# Altium PCB piezo-button-pcb1.PcbDoc
Units mm, origin at the board's own origin, x right, y up, seen from the top; angles counter-clockwise.
Board outline 23.9 x 15.9 mm, 2 copper layers (Top Layer, Bottom Layer); 17 components, 12 nets, 44 pads, 6 vias.
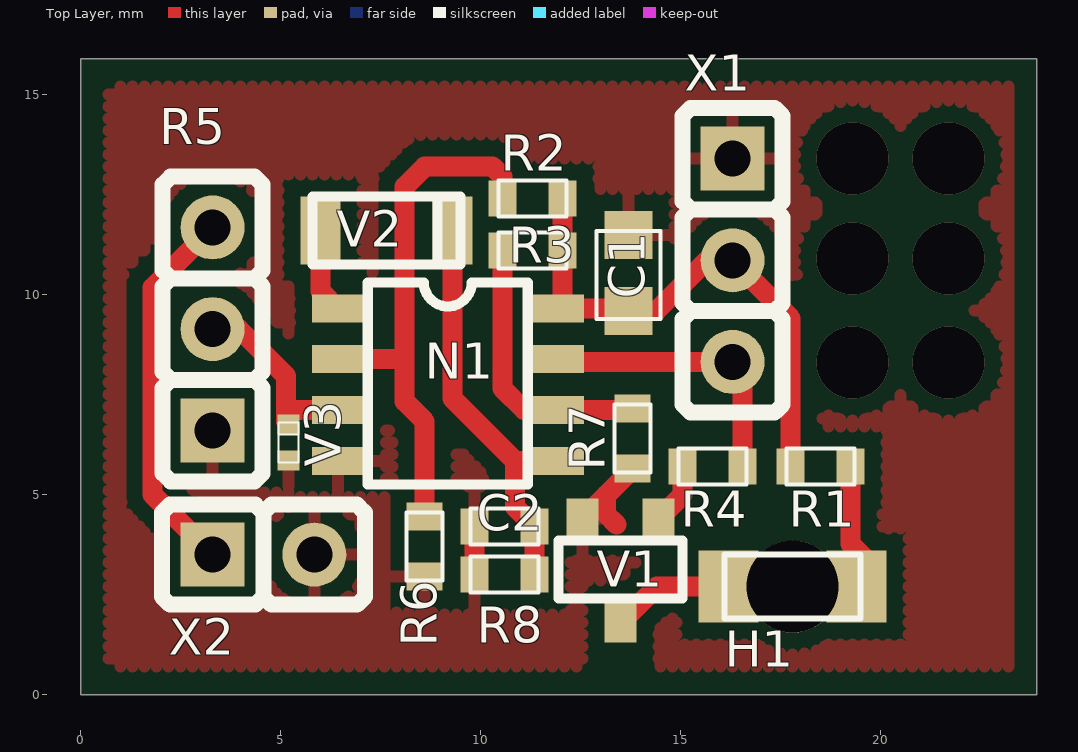
[diagram p0: Top Layer view]
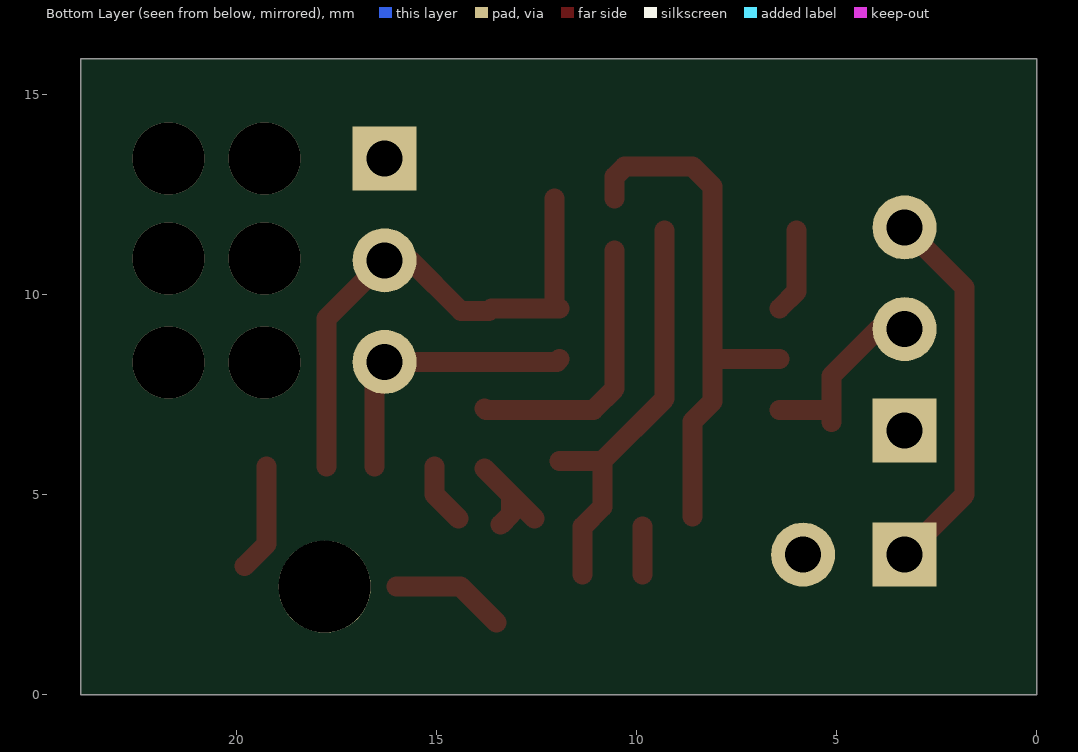
[diagram p1: Bottom Layer view, seen from below]

## Layer stack, top to bottom
Top Layer: signal copper 0.0356
Dielectric: core 0.32, FR-4, Dk 4.8
Bottom Layer: signal copper 0.0356

## Board outline
0,0 0,15.9 23.9,15.9 23.9,0

## Design rules (kind name [scope] priority, off if disabled: settings)
Clearance [All] p1: gap=0.4
ComponentClearance [All] p1: gap=0.1 collisioncheckmode=0
Height [All] p1 off: minheight=0 maxheight=25.4 prefheight=12.7
PasteMaskExpansion [All] p1 off: expansion=0
PlaneConnect [All] p1: planeconnectstyle=Relief reliefexpansion=0.508 reliefentries=4 reliefconductorwidth=0.3 reliefairgap=0.4
PolygonConnect [All] p1: connectstyle=Relief reliefconductorwidth=0.3 reliefentries=4 polygonreliefangle="90 Angle"
RoomDefinition piezo-button-sheet1 [InComponentClass('piezo-button-sheet1')] p1: confinementstyle=ConfineIn formatcopy=TRUE outline 0,0 23.9,0 23.9,15.9 0,15.9
RoutingLayers [All] p1: top layer=Horizontal bottom layer=Vertical
RoutingVias [All] p1: holewidth=0.9 width=1.8 viastyle="Through Hole" minholewidth=0.9 minwidth=1.8 maxholewidth=0.9 maxwidth=1.8
SolderMaskExpansion [All] p1 off: expansion=0.102
TestPointUsage [All] p1: valid=0 allowmultiple=FALSE
Testpoint [All] p1: side=15 testpointundercomponent=TRUE minsize=1.016 maxsize=2.54 preferedsize=1.524 minholesize=0 maxholesize=1.016 preferedholesize=0.813 testpointgrid=0.025 style=1023 order=1234567890
Width [All] p1: maxlimit=0.7 minlimit=0.3 preferedwidth=0.3 toplayer_prefwidth=0.5 minimp=50.000000 maximp=50.000000 favimp=50.000000
13 further rules are at their usual default settings.

## Components (designator, comment, footprint, x,y, rotation, side; value= is the part's Value field where it differs from the comment)
C1 "C_SMD_CER_10U_16V_10%_X5R_0805" SMD_0805 13.7,11.5 r270 top
C2 "C_SMD_CER_1U_16V_10%_X5R_0603" SMD_0603 10.6,4.2 r0 top
H1 "H_SMD_LED_GREEN_1206" SMD_1206_BOTTOM_ENTRY 19.5,2.7 r180 top
N1 "N_TL062CD_SOP-8" SMD_SOP_8 11.928,9.656 r270 top
R1 "R_SMD_THINFILM_100E_0W1_1%_50PPM_0603" SMD_0603 18.5,5.7 r180 top
R2 "R_SMD_THINFILM_47K_0W1_1%_50PPM_0603" SMD_0603 11.3,12.4 r0 top
R3 "R_SMD_THINFILM_47K_0W1_1%_50PPM_0603" SMD_0603 11.3,11.1 r0 top
R4 "R_SMD_THINFILM_47K_0W1_1%_50PPM_0603" SMD_0603 15.8,5.7 r180 top
R5 "R_THT_POT_100K_2W_10%_150PPM" THT_CON_P2.54_D0.9_1X3 3.3,6.6 r90 top
R6 "R_SMD_THINFILM_22K_0W1_1&_50PPM_0603" SMD_0603 8.6,3.7 r90 top
R7 "R_SMD_THINFILM_22K_0W1_1&_50PPM_0603" SMD_0603 13.8,6.4 r90 top
R8 "R_SMD_THINFILM_470K_0W1_1%_50PPM_0603" SMD_0603 10.6,3 r0 top
V1 "V_SMD_TRANS_NPN_BC847B_50V_0A2_SOT-23-3" SMD_SOT_23_3 13.5,3.1 r180 top
V2 "V_SMD_DIODE_LL4148_75V_0A15_SOD-80" SMD_SOD_80P 6,11.6 r0 top
V3 "V_SMD_Z-DIODE_4V7_0W125_0402" SMD_0402P 5.2,6.3 r90 top
X1 "X_CONNECTOR_P2.54_D0.9_1X3" THT_CON_P2.54_D0.9_1X3 16.3,13.4 r270 top
X2 "X_CONNECTOR_P2.54_D0.9_1X2" THT_CON_P2.54_D0.9_1X2 3.3,3.5 r0 top

## Footprints (in the part's own frame and the unit in brackets; to place one, negate y for a bottom-side part, rotate by r counter-clockwise, add the part's x,y. Pads: shape width x height; smd on the part's side, far side on the other; paste and mask are expansions set on the pad)
SMD_0402P [mm] "SMD_0402P"
  rect 0.5x0.55 smd: 1(-0.45,0) 2(0.45,0)
  silkscreen extent -0.5,-0.25 0.5,0.25
SMD_0603 [mm] "SMD_0603"
  rect 0.7x0.9 smd: 1(-0.75,0) 2(0.75,0)
  silkscreen extent -0.85,-0.45 0.85,0.45
SMD_0805 [mm] "SMD_0805"
  rect 1.2x1.2 smd: 1(0.01,-0.007) 2(1.91,-0.007)
  silkscreen extent -0.09,-0.81 2.11,0.79
SMD_1206_BOTTOM_ENTRY [mm] "SMD_1206_BOTTOM_ENTRY"
  round 2.3 hole 2.3 unplated: 0(1.7,0)
  rect 1.5x1.8 smd: 1(0.1,0) 2(3.3,0)
  silkscreen extent 0,-0.8 3.41,0.8
SMD_SOD_80P [mm] "SMD_SOD_80P"
  rect 1x1.7 smd: 1(0,0) 2(3.3,0)
  silkscreen extent -0.2,-0.85 3.5,0.85
SMD_SOP_8 [mm] "SMD_SOP_8"
  rect 0.7x1.3 smd: 1(0,-5.5) 2(1.27,-5.5) 3(2.54,-5.5) 4(3.81,-5.5) 5(3.81,0) 6(2.54,0) 7(1.27,0) 8(0,0)
  silkscreen extent -0.65,-4.75 4.4,-0.75
SMD_SOT_23_3 [mm] "SMD_SOT_23_3"
  rect 0.8x1 smd: 1(-0.95,-1.3) 2(0.95,-1.3) 3(0,1.3)
  silkscreen extent -1.55,-0.75 1.55,0.7
THT_CON_P2.54_D0.9_1X2 [mm]
  rect 1.6x1.6 hole 0.9: 1(0,0)
  round 1.6 hole 0.9: 2(2.54,0)
  silkscreen extent -1.27,-1.25 3.81,1.25
THT_CON_P2.54_D0.9_1X3 [mm]
  rect 1.6x1.6 hole 0.9: 1(0,0)
  round 1.6 hole 0.9: 2(2.54,0) 3(5.08,0)
  silkscreen extent -1.27,-1.25 6.35,1.25

## Part data
C1 C2: "SMD Capacitor"
H1: "LED GREEN CLEAR 1206 REV MT SMD"
N1: "Low-power JFET dual operation amplifier"
R1 R2 R3 R4 R6 R7 R8: "SMD Resistor"
R5: "POT 100K OHM 3/4\" RD CERM"
V1: "NPN Transistor"
V3: library part V_SMD_Z-DIODE_4V7_0W125_3%_0402, "Zener Diode"
X1: "Pitch 2.54, Diameter 0.9mm, 1 row, 3 columns"
X2: "Pitch 2.54, Diameter 0.9mm, 1 row, 2 columns"

## Via types
v1: diameter 1.8, hole 1.8, Top Layer to Bottom Layer, 6 vias

## Nets (pads, with @x,y where several pads share a name; then routed paths per layer and width w, separated by ;. In a path a pad name is that pad's centre, name@x,y a point inside that pad or via, vN(x,y) a via of type N, cw(c..) or ccw(c..) an arc to the next point about the centre after c; other vN are vias at no path point)
GND: C1.1 C2.1 N1.4 R5.1 R6.1 R7.1 R8.1 V1.2 V3.1 X1.1 X2.2 | length 3.8
  Top Layer w0.5: R8.1 C2.1 ; V1.2 R7.1 ; 13.136,4.986 13.136,4.514 13.4,4.25
NetC2_2: C2.2 N1.5 R8.2 V2.2 | length 10.5
  Top Layer w0.5: V2.2 9.3,7.4 10.854,5.846 ; R8.2 C2.2 10.854,4.696 10.854,5.846 ; N1.5 10.854,5.846
NetH1_1: H1.1 R1.1 | length 2.7
  Top Layer w0.5: R1.1 19.25,3.767 H1.1@19.8,3.217
NetH1_2: H1.2 V1.3 | length 2.9
  Top Layer w0.5: V1.3 14.4,2.7 H1.2@16,2.7
NetN1_1: N1.1 V2.1 | length 2.1
  Top Layer w0.5: V2.1 6,10.084 N1.1
NetN1_2: N1.2 R2.1 R6.2 | length 13.4
  Top Layer w0.5: N1.2 8.086,8.386 ; R6.2 8.6,6.834 8.1,7.334 8.1,12.7 8.6,13.2 10.3,13.2 10.55,12.95 R2.1
NetN1_3: N1.3 R5.2 V3.2 | length 4.7
  Top Layer w0.5: R5.2 3.96,9.14 5.128,7.972 V3.2@5.128,6.822 ; 5.144,7.116 N1.3
NetN1_6: N1.6 R3.1 R7.2 | length 6.9
  Top Layer w0.5: R3.1 10.55,7.65 11.084,7.116 13.766,7.116 R7.2
NetN1_7: N1.7 R4.1 X1.3 | length 7.1
  Top Layer w0.5: N1.7 11.994,8.32 X1.3 16.55,8.07 R4.1
NetR4_2: R4.2 V1.1 | length 1.5
  Top Layer w0.5: V1.1 15.05,5 R4.2
NetR5_3: R5.3 X2.1 | length 9.4
  Top Layer w0.5: X2.1 1.8,5 1.8,10.18 R5.3
VCC: C1.2 N1.8 R1.2 R2.2 R3.2 X1.2 | length 13.5
  Top Layer w0.5: R2.2 12.05,9.778 N1.8 13.627,9.656 C1.2 14.39,9.59 15.66,10.86 X1.2 17.75,9.41 R1.2
pads on no net: H1.0
copper on no net:
  other v1: 19.3,8.3 21.7,8.3 19.3,10.9 21.7,10.9 19.3,13.4 21.7,13.4

## Polygon pours and split planes (outlines as drawn)
GND on Top Layer (hatched 90Degree grid 0 track 0.3, remove dead copper): 14.788,15.2 23.2,15.2 23.2,0.7 0.7,0.7 0.7,15.2